# Altium PCB Для Сережи.PcbDoc
Units mil, origin at the board's own origin, x right, y up, seen from the top; angles counter-clockwise.
Board outline 6000 x 4000 mil, 2 copper layers (Top Layer, Bottom Layer); 108 components, 130 nets, 780 pads, 0 vias.
Unrouted connection lines stored in the file: 481.
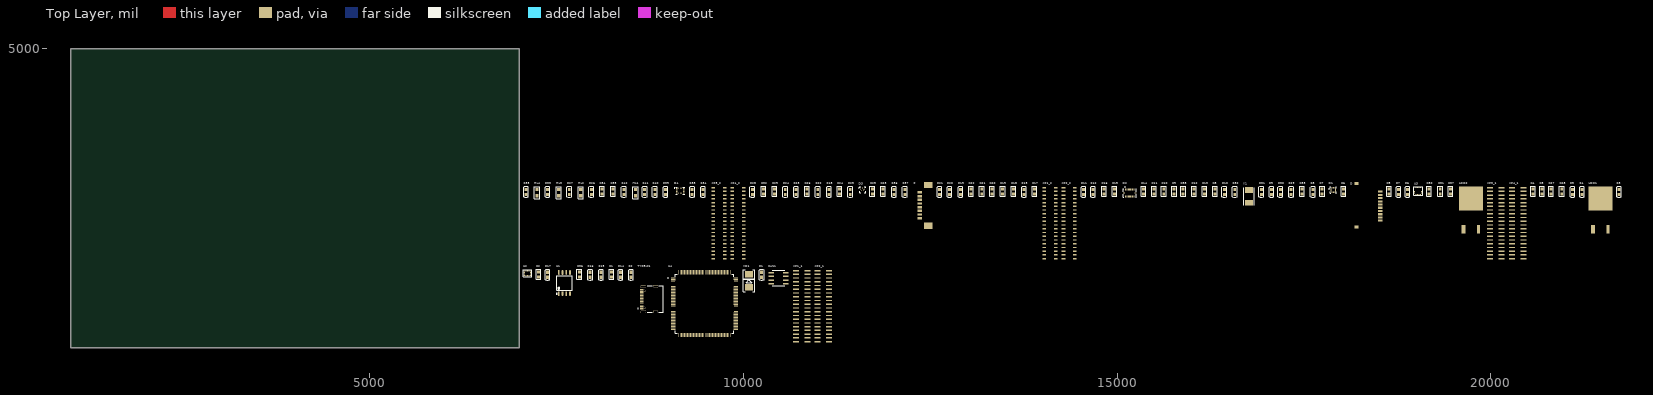
[diagram p0: Top Layer view]
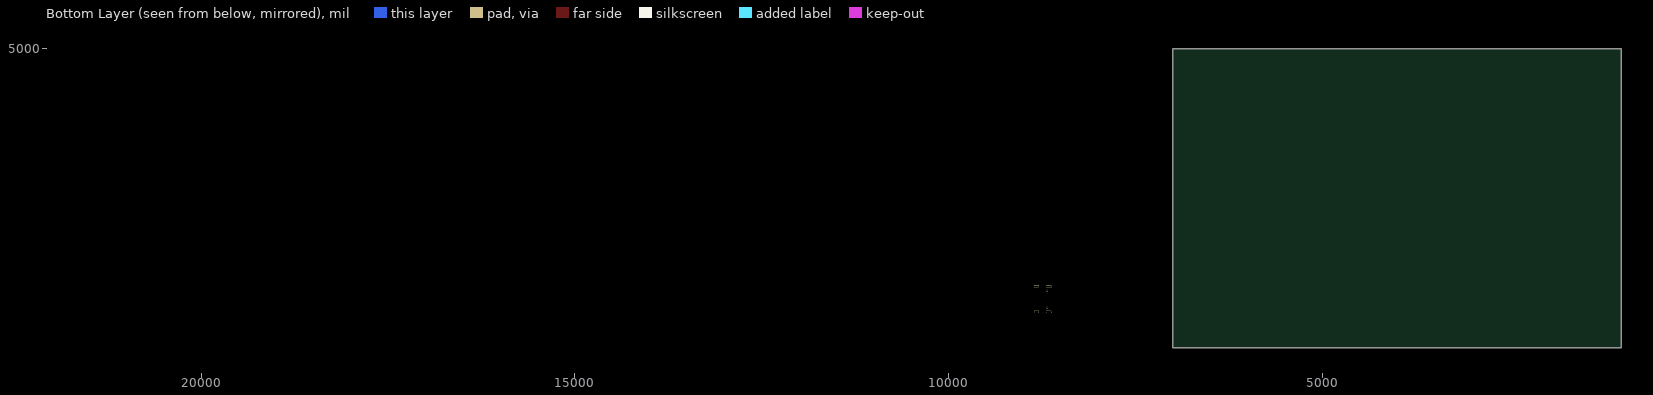
[diagram p1: Bottom Layer view, seen from below]

## Layer stack, top to bottom
Top Solder: solder mask 0.4, Solder Resist, Dk 3.5
Top Layer: signal copper 1.4
Dielectric 1: dielectric 12.6, FR-4, Dk 4.8
Bottom Layer: signal copper 1.4
Bottom Solder: solder mask 0.4, Solder Resist, Dk 3.5

## Board outline
1000,1000 7000,1000 7000,5000 1000,5000

## Design rules (kind name [scope] priority, off if disabled: settings)
Clearance [All] p1: gap=10 ignorepadtopadclearanceinfootprint=FALSE except(0: Arc-Hole Track-Hole SMDPad-Hole THPad-Hole Via-Hole Fill-Hole Poly-Hole Region-Hole Text-Hole)
PolygonConnect [All] p1: connectstyle=Relief reliefconductorwidth=10 reliefentries=4 polygonreliefangle="90 Angle" airgapwidth=10
RoutingVias [All] p1: holewidth=28 width=50 viastyle="Through Hole" minholewidth=28 minwidth=50 maxholewidth=28 maxwidth=50
SolderMaskExpansion [All] p1: expansion=4 istentingtop=FALSE
Width [All] p1: maxlimit=10 minlimit=10 preferedwidth=10
30 further rules are at their usual default settings.

## Components (designator, comment, footprint, x,y, rotation, side; value= is the part's Value field where it differs from the comment)
C1 "47 nF" C0603 8235,1980 r90 top
C2 "100 nF" C0603 7260,1980 r90 top
C3 "100 nF" C0603 20685,3090 r90 top
C4 "100 nF" C0603 20565,3090 r90 top
C5 "4.7 uF" C0603 18640,3090 r90 top
C6 "0.22 uF" C0603 18030,3090 r90 top
C7 "22 pF" C0603 17745,3090 r90 top
C8 "22 pF" C0603 16310,3090 r90 top
C9 "100 nF" C0603 15765,3090 r90 top
C10 "100 nF" C0603 15625,3090 r90 top
C11 "100 nF" C0603 15495,3090 r90 top
C12 "100 nF" C0603 16030,3090 r90 top
C13 "100 nF" C0603 16170,3090 r90 top
C14 "100 nF" C0603 15355,3090 r90 top
C15 "100 nF" C0603 14965,3090 r90 top
C16 "100 nF" C0603 14825,3090 r90 top
C17 "100 nF" C0603 13895,3090 r90 top
C18 "100 nF" C0603 13615,3090 r90 top
C19 "100 nF" C0603 13470,3090 r90 top
C20 "100 nF" C0603 13325,3090 r90 top
C21 "100 nF" C0603 13190,3090 r90 top
C22 "100 nF" C0603 13045,3090 r90 top
C23 "100 nF" C0603 11870,3090 r90 top
C24 "100 nF" C0603 11285,3090 r90 top
C25 "100 nF" C0603 11725,3090 r90 top
C26 "100 nF" C0603 10850,3090 r90 top
C27 "0.1 uF" C0603 20805,3090 r90 top
C28 "10 uF" C0603 20950,3090 r90 top
C29 "100 nF" C0603 10415,3090 r90 top
C30 "0.1 uF" C0603 19175,3090 r90 top
C31 "10 uF" C0603 19325,3090 r90 top
C32 "100 nF" C0603 10270,3090 r90 top
C33 "0.1 uF" C0603 17475,3090 r90 top
C34 "100 nF" C0603 8110,3090 r90 top
C35 "100 nF" C0603 8255,3090 r90 top
C36 "100 nF" C0603 7805,1980 r90 top
C37 "100 nF" C0603 19460,3090 r90 top
C38 "100 nF" C0603 15885,3090 r90 top
CAN1 "TJA1040T" SO-8_S 10470,1930 r0 top
D "D" GTFP08131Y2HR 18235,2890 r90 top
D1 "BMP388" PQFN50P200X200X80-10N 17895,3110 r0 top
D2 "BMI088" PQFN50P450X300X100-16N 15170,3070 r0 top
D3 "BMM150" XDCR_BMM150 11595,3115 r0 top
D4 "BMI270" XDCR_BMI270 9155,3100 r0 top
HL1 "" LD0805 8555,3075 r90 top
HL2 "" LD0805 7825,3075 r90 top
HL3 "" LD0805 7530,3075 r90 top
HL4 "" LD0805 7240,3075 r90 top
LDO1 "КФ1158Н" ТО-263 21365,2625 r0 top
LDO2 "КФ1158Н" ТО-263 19630,2625 r0 top
P "Header 1x8" "PicoBlade 8pin" 12360,2905 r90 top
R1 "60Om" R0603 10245,1975 r90 top
R2 "60 Om" R0603 8495,1975 r90 top
R3 "0" R0603 21715,3085 r90 top
R4 "0" R0603 21220,3085 r90 top
R5 "0" R0603 21095,3085 r90 top
R6 "2.2k" R0603 18885,3085 r90 top
R7 "2.2k" R0603 18765,3085 r90 top
R8 "0" R0603 17620,3085 r90 top
R9 "0" R0603 17065,3085 r90 top
R10 "0" R0603 16435,3085 r90 top
R11 "0" R0603 14550,3085 r90 top
R12 "0" R0603 14680,3085 r90 top
R13 "0" R0603 13755,3085 r90 top
R14 "5,1 кОм" R0603 8355,1975 r90 top
R15 "68" R0603 8095,1975 r90 top
R16 "68" R0603 7950,1975 r90 top
R17 "5,1 кОм" R0603 7380,1975 r90 top
R18 "47 Ом" R0603 11145,3085 r90 top
R19 "47 кОм" R0603 12905,3085 r90 top
R20 "47 кОм" R0603 12760,3085 r90 top
R21 "47 кОм" R0603 12625,3085 r90 top
R22 "0" R0603 10995,3085 r90 top
R23 "0" R0603 10705,3085 r90 top
R24 "0" R0603 10560,3085 r90 top
R25 "47 кОм" R0603 11430,3085 r90 top
R26 "220" R0603 7965,3085 r90 top
R27 "220" R0603 7670,3085 r90 top
R28 "0" R0603 10120,3085 r90 top
R29 "47 кОм" R0603 17330,3085 r90 top
R30 "47 кОм" R0603 17185,3085 r90 top
R31 "47 кОм" R0603 16930,3085 r90 top
R32 "47 кОм" R0603 16575,3085 r90 top
R33 "220" R0603 7380,3085 r90 top
R34 "0" R0603 9460,3085 r90 top
R35 "220" R0603 7090,3085 r90 top
R36 "10 kOm" R0603 12015,3085 r90 top
R37 "0" R0603 12160,3085 r90 top
R38 "10 кОм" R0603 9315,3085 r90 top
R39 "0" R0603 8960,3085 r90 top
R40 "0" R0603 8815,3085 r90 top
R41 "0" R0603 8680,3085 r90 top
R42 "0" R0603 8400,3085 r90 top
TYPE-C1 "TYPE-C-31-M-12" HRO_TYPE-C-31-M-12 8825,1650 r90 top
U1 "W25Q128FVSIG" SOIC127P790X216-8N 7605,1865 r90 top
U2 "QMI8658" QMI8658 7115,1995 r0 top
U3 "QMC5883L" QMC5883L 19030,3100 r0 top
U4 "K1921BK01T2" QFP50P2200X2200X160-144N 9480,1590 r0 top
VD1 "" DO-214AA 10075,1895 r90 top
XP1_1 "PLLD-1.27-40S" "Headr 2x20 male" 10780,1565 r0 top
XP1_2 "PLLD-1.27-40S" "Headr 2x20 Female" 14100,2710 r0 top
XP2_1 "PLLD-1.27-40S" "Headr 2x20 male" 11070,1565 r0 top
XP2_2 "PLLD-1.27-40S" "Headr 2x20 Female" 14355,2710 r0 top
XP3_1 "PLLD-1.27-40S" "Headr 2x20 male" 20065,2675 r0 top
XP3_2 "PLLD-1.27-40S" "Headr 2x20 Female" 9670,2710 r0 top
XP4_1 "PLLD-1.27-40S" "Headr 2x20 male" 20360,2675 r0 top
XP4_2 "PLLD-1.27-40S" "Headr 2x20 Female" 9925,2710 r0 top
Y1 "8 мгц" XTAL_ABM7-8.000MHZ-8-R80-D2Y-T 16765,3025 r90 top

## Footprints (in the part's own frame and the unit in brackets; to place one, negate y for a bottom-side part, rotate by r counter-clockwise, add the part's x,y. Pads: shape width x height; smd on the part's side, far side on the other; paste and mask are expansions set on the pad)
C0603 [mm] "1608M"
  rect 1.1x1 smd: 1(-0.85,0) 2(0.85,0)
  silkscreen extent -1.7,-0.8 1.7,0.8, body extent -0.8,-0.4 0.8,0.4, height 0.91
DO-214AA [mm] "(SMB) Low profile package"
  rect 2.2x2.8 smd: 1(-2.25,0) 2(2.25,0)
  silkscreen extent -3.75,-2 3.75,2, body extent -2.7,-1.8 2.7,1.8, height 2.3
GTFP08131Y2HR [mm]
  rect 0.7x1.6 smd: 1(-4.85,-7.325) 2(-3.75,-7.325) 3(-2.65,-7.325) 4(-1.55,-7.325) 5(-0.45,-7.325) 6(0.65,-7.325) 7(1.75,-7.325) 8(2.85,-7.325) 9(3.95,-7.325) CD(5.05,-7.325)
  rect 1x1.5 smd: S1(-7.05,0.8) S2(7.8,0.8)
"Headr 2x20 Female" [mm]
  rect 1.2x0.45 smd: 1(-1.82,10.962) 2(2.08,10.962) 3(-1.82,9.692) 4(2.08,9.692) 5(-1.82,8.422) 6(2.08,8.422) 7(-1.82,7.152) 8(2.08,7.152) 9(-1.82,5.882) 10(2.08,5.882) 11(-1.82,4.612) 12(2.08,4.612) 13(-1.82,3.342) 14(2.08,3.342) 15(-1.82,2.072) 16(2.08,2.072) 17(-1.82,0.802) 18(2.08,0.802) 19(-1.82,-0.468) 20(2.08,-0.468) 21(-1.82,-1.738) 22(2.08,-1.738) 23(-1.82,-3.008) 24(2.08,-3.008) 25(-1.82,-4.278) 26(2.08,-4.278) 27(-1.82,-5.548) 28(2.08,-5.548) 29(-1.82,-6.818) 30(2.08,-6.818) 31(-1.82,-8.088) 32(2.08,-8.088) 33(-1.82,-9.358) 34(2.08,-9.358) 35(-1.82,-10.628) 36(2.08,-10.628) 37(-1.82,-11.898) 38(2.08,-11.898) 39(-1.82,-13.168) 40(2.08,-13.168)
"Headr 2x20 male" [mm]
  rect 2x0.45 smd: 1(-1.947,11.851) 2(1.953,11.851) 3(-1.947,10.581) 4(1.953,10.581) 5(-1.947,9.311) 6(1.953,9.311) 7(-1.947,8.041) 8(1.953,8.041) 9(-1.947,6.771) 10(1.953,6.771) 11(-1.947,5.501) 12(1.953,5.501) 13(-1.947,4.231) 14(1.953,4.231) 15(-1.947,2.961) 16(1.953,2.961) 17(-1.947,1.691) 18(1.953,1.691) 19(-1.947,0.421) 20(1.953,0.421) 21(-1.947,-0.849) 22(1.953,-0.849) 23(-1.947,-2.119) 24(1.953,-2.119) 25(-1.947,-3.389) 26(1.953,-3.389) 27(-1.947,-4.659) 28(1.953,-4.659) 29(-1.947,-5.929) 30(1.953,-5.929) 31(-1.947,-7.199) 32(1.953,-7.199) 33(-1.947,-8.469) 34(1.953,-8.469) 35(-1.947,-9.739) 36(1.953,-9.739) 37(-1.947,-11.009) 38(1.953,-11.009) 39(-1.947,-12.279) 40(1.953,-12.279)
HRO_TYPE-C-31-M-12 [mm]
  rect 0.6x1.14 smd mask+0.05: A1_B12(-3.2,4.75) A4_B9(-2.4,4.75) B1_A12(3.2,4.75) B4_A9(2.4,4.75)
  rect 0.3x1.14 smd mask+0.05: A5(-1.25,4.75) A6(-0.25,4.75) A7(0.25,4.75) A8(1.25,4.75) B5(1.75,4.75) B6(0.75,4.75) B7(-0.75,4.75) B8(-1.75,4.75)
  oval 0.9x2 hole 0.6 slot 1.7 at 90 deg: S1(-4.325,4.17) S2(4.325,4.17)
  oval 0.9x1.7 hole 0.6 slot 1.4 at 90 deg: S3(-4.325,0) S4(4.325,0)
  round 0.6 hole 0.6 unplated: ""(-2.89,3.68) ""(2.89,3.68)
  silkscreen extent -4.47,-2.6 4.47,6.1, body extent -4.47,-2.6 4.47,5.31, height 3.31
LD0805 [mm]
  rect 1.1x1.1 smd: 1(-1.1,0) 2(1.1,0)
  silkscreen extent -2,-0.9 2,0.9, body extent -1,-0.62 1,0.63, height 0.73
"PicoBlade 8pin" [mm]
  rect 0.8x1.6 smd: 1(-4.365,0) 2(-3.115,0) 3(-1.865,0) 4(-0.615,0) 5(0.635,0) 6(1.885,0) 7(3.135,0) 8(4.385,0)
  rect 2.1x3 smd: S(-6.915,-2.9) S(6.935,-2.9)
PQFN50P200X200X80-10N [mm]
  rrect9% 0.35x0.38 smd: 1(-0.765,0.25) 2(-0.765,-0.25) 3(-0.5,-0.765) 4(0,-0.765) 5(0.5,-0.765) 6(0.765,-0.25) 7(0.765,0.25) 8(0.5,0.765) 9(0,0.765) 10(-0.5,0.765)
  silkscreen extent -1.6,-1.03 1.03,1.03
PQFN50P450X300X100-16N [mm]
  rect 0.35x0.59 smd: 1(-1.5,1.165) 2(-1,1.165) 3(-0.5,1.165) 4(0,1.165) 5(0.5,1.165) 6(1,1.165) 7(1.5,1.165) 9(1.5,-1.165) 10(1,-1.165) 11(0.5,-1.165) 12(0,-1.165) 13(-0.5,-1.165) 14(-1,-1.165) 15(-1.5,-1.165)
  rect 0.59x0.35 smd: 8(1.915,0) 16(-1.915,0)
  silkscreen extent -2.25,-1.5 2.25,2.2
QFP50P2200X2200X160-144N [mm]
  rrect25% 1.47x0.28 smd: 1(-10.67,8.75) 2(-10.67,8.25) 3(-10.67,7.75) 4(-10.67,7.25) 5(-10.67,6.75) 6(-10.67,6.25) 7(-10.67,5.75) 8(-10.67,5.25) 9(-10.67,4.75) 10(-10.67,4.25) 11(-10.67,3.75) 12(-10.67,3.25) 13(-10.67,2.75) 14(-10.67,2.25) 15(-10.67,1.75) 16(-10.67,1.25) 17(-10.67,0.75) 18(-10.67,0.25) 19(-10.67,-0.25) 20(-10.67,-0.75) 21(-10.67,-1.25) 22(-10.67,-1.75) 23(-10.67,-2.25) 24(-10.67,-2.75) 25(-10.67,-3.25) 26(-10.67,-3.75) 27(-10.67,-4.25) 28(-10.67,-4.75) 29(-10.67,-5.25) 30(-10.67,-5.75) 31(-10.67,-6.25) 32(-10.67,-6.75) 33(-10.67,-7.25) 34(-10.67,-7.75) 35(-10.67,-8.25) 36(-10.67,-8.75) 73(10.67,-8.75) 74(10.67,-8.25) 75(10.67,-7.75) 76(10.67,-7.25) 77(10.67,-6.75) 78(10.67,-6.25) 79(10.67,-5.75) 80(10.67,-5.25) 81(10.67,-4.75) 82(10.67,-4.25) 83(10.67,-3.75) 84(10.67,-3.25) 85(10.67,-2.75) 86(10.67,-2.25) 87(10.67,-1.75) 88(10.67,-1.25) 89(10.67,-0.75) 90(10.67,-0.25) 91(10.67,0.25) 92(10.67,0.75) 93(10.67,1.25) 94(10.67,1.75) 95(10.67,2.25) 96(10.67,2.75) 97(10.67,3.25) 98(10.67,3.75) 99(10.67,4.25) 100(10.67,4.75) 101(10.67,5.25) 102(10.67,5.75) 103(10.67,6.25) 104(10.67,6.75) 105(10.67,7.25) 106(10.67,7.75) 107(10.67,8.25) 108(10.67,8.75)
  rrect25% 0.28x1.47 smd: 37(-8.75,-10.67) 38(-8.25,-10.67) 39(-7.75,-10.67) 40(-7.25,-10.67) 41(-6.75,-10.67) 42(-6.25,-10.67) 43(-5.75,-10.67) 44(-5.25,-10.67) 45(-4.75,-10.67) 46(-4.25,-10.67) 47(-3.75,-10.67) 48(-3.25,-10.67) 49(-2.75,-10.67) 50(-2.25,-10.67) 51(-1.75,-10.67) 52(-1.25,-10.67) 53(-0.75,-10.67) 54(-0.25,-10.67) 55(0.25,-10.67) 56(0.75,-10.67) 57(1.25,-10.67) 58(1.75,-10.67) 59(2.25,-10.67) 60(2.75,-10.67) 61(3.25,-10.67) 62(3.75,-10.67) 63(4.25,-10.67) 64(4.75,-10.67) 65(5.25,-10.67) 66(5.75,-10.67) 67(6.25,-10.67) 68(6.75,-10.67) 69(7.25,-10.67) 70(7.75,-10.67) 71(8.25,-10.67) 72(8.75,-10.67) 109(8.75,10.67) 110(8.25,10.67) 111(7.75,10.67) 112(7.25,10.67) 113(6.75,10.67) 114(6.25,10.67) 115(5.75,10.67) 116(5.25,10.67) 117(4.75,10.67) 118(4.25,10.67) 119(3.75,10.67) 120(3.25,10.67) 121(2.75,10.67) 122(2.25,10.67) 123(1.75,10.67) 124(1.25,10.67) 125(0.75,10.67) 126(0.25,10.67) 127(-0.25,10.67) 128(-0.75,10.67) 129(-1.25,10.67) 130(-1.75,10.67) 131(-2.25,10.67) 132(-2.75,10.67) 133(-3.25,10.67) 134(-3.75,10.67) 135(-4.25,10.67) 136(-4.75,10.67) 137(-5.25,10.67) 138(-5.75,10.67) 139(-6.25,10.67) 140(-6.75,10.67) 141(-7.25,10.67) 142(-7.75,10.67) 143(-8.25,10.67) 144(-8.75,10.67)
  silkscreen extent -12.44,-10 10,10
QMC5883L [mm]
  rect 0.4x0.3 smd: 1(1.225,0.675) 2(1.225,0.175) 3(1.225,-0.325) 4(1.225,-0.825) 9(-1.225,-0.825) 10(-1.225,-0.325) 11(-1.225,0.175) 12(-1.225,0.675)
  rect 0.3x0.4 smd: 5(0.75,-1.3) 6(0.25,-1.3) 7(-0.25,-1.3) 8(-0.75,-1.3) 13(-0.75,1.15) 14(-0.25,1.15) 15(0.25,1.15) 16(0.75,1.15)
  silkscreen extent -1.5,-1.58 1.5,1.42
QMI8658 [mm]
  rect 0.5x0.3 smd: 1(1.075,0.8) 2(1.075,0.3) 3(1.075,-0.2) 4(1.075,-0.7) 8(-1.225,-0.7) 9(-1.225,-0.2) 10(-1.225,0.3) 11(-1.225,0.8)
  rect 0.3x0.5 smd: 5(0.425,-0.85) 6(-0.075,-0.85) 7(-0.575,-0.85) 12(-0.575,0.95) 13(-0.075,0.95) 14(0.425,0.95)
  silkscreen extent -1.57,-1.2 1.43,1.3
R0603 [mm] "1608M"
  rect 1.1x1 smd: 1(-0.85,0) 2(0.85,0)
  silkscreen extent -1.8,-0.8 1.8,0.8, body extent -0.8,-0.4 0.8,0.4, height 0.38
SO-8_S [mil]
  rect 78x21 smd: 1(-97,75) 2(-97,25) 3(-97,-25) 4(-97,-75) 5(97,-75) 6(97,-25) 7(97,25) 8(97,75)
  silkscreen extent -84,-104 84,104, body extent -96,-118 96,118, height 69
SOIC127P790X216-8N [mm]
  oval 1.6x0.6 smd: 1(-3.6,1.905) 2(-3.6,0.635) 3(-3.6,-0.635) 4(-3.6,-1.905) 5(3.6,-1.905) 6(3.6,-0.635) 7(3.6,0.635) 8(3.6,1.905)
  silkscreen extent -3.82,-2.65 2.47,2.82
XDCR_BMI270 [mm]
  rect 0.475x0.25 smd: 1(-1.162,0.75) 2(-1.162,0.25) 3(-1.162,-0.25) 4(-1.162,-0.75) 8(1.162,-0.75) 9(1.162,-0.25) 10(1.162,0.25) 11(1.162,0.75)
  rect 0.25x0.475 smd: 5(-0.5,-0.913) 6(0,-0.913) 7(0.5,-0.913) 12(0.5,0.913) 13(0,0.913) 14(-0.5,0.913)
  silkscreen extent -2.07,-1.25 1.5,1.25, body extent -1.5,-1.25 1.5,1.25, height 0.87
XDCR_BMM150 [mm]
  round 0.2 smd: A1(-0.601,0.601) A3(-0.035,0.601) A5(0.531,0.601) B2(-0.318,0.318) B4(0.248,0.318) C1(-0.601,0.035) C5(0.531,0.035) D2(-0.318,-0.248) D4(0.248,-0.248) E1(-0.601,-0.531) E3(-0.035,-0.531) E5(0.531,-0.531)
  silkscreen extent -1.37,-1.02 1.02,1.02
XTAL_ABM7-8.000MHZ-8-R80-D2Y-T [mm]
  rect 1.9x2.6 smd: 1(-2.15,0) 2(2.15,0)
  silkscreen extent -3,-1.75 3,1.75
ТО-263 [mm]
  rect 1.4x2.79 smd: 1(0.127,-1.022)
  rect 8.13x8.13 smd: 2(2.667,9.398)
  rect 0.99x2.79 smd: 3(5.207,-1.022)

## Part data
C1 C2 C3 C4 C5 C6 C7 C8 C9 C10 C11 C12 C13 C14 C15 C16 C17 C18 C19 C20 C21 C22 C23 C24 C25 C26 C27 C28 C29 C30 C31 C32 C33 C34 C35 C36 C37 C38: library part Capacitor, Published=18.05.2010, Publisher="Andrew Danich", Type=Конденсатор
D: library part GTFP08131Y2HR
HL1 HL2 HL3 HL4: library part Led-1, Published=03.12.2013, Publisher="Andrew Danich", Type="Индикатор единичный"
R1 R2 R3 R4 R5 R6 R7 R8 R9 R10 R11 R12 R13 R14 R15 R16 R17 R18 R19 R20 R21 R22 R23 R24 R25 R26 R27 R28 R29 R30 R31 R32 R33 R34 R35 R36 R37 R38 R39 R40 R41 R42: library part Resistor, Published=24.03.2010, Publisher="Andrew Danich", Type=Резистор
VD1: library part Schottky
Y1: library part ABM7-8.000MHZ-8-R80-D2Y-T, "Crystal 22.1184MHz Ã‚Â±20ppm (Tol) Ã‚Â±30ppm (Stability) 18pF FUND 50Ohm 2-Pin Mini-CSMD T/R", Package=None, Availability=Unavailable, MP=ABM7-8.000MHZ-8-R80-D2Y-T, Price=None

## Nets (pads, with @x,y where several pads share a name; then routed paths per layer and width w, separated by ;. In a path a pad name is that pad's centre, name@x,y a point inside that pad or via, vN(x,y) a via of type N, cw(c..) or ccw(c..) an arc to the next point about the centre after c; other vN are vias at no path point)
3V3: C2.2 C9.2 C10.2 C11.2 C14.2 C15.2 C16.2 C17.2 C18.2 C19.2 C20.2 C21.2 C22.2 C24.2 C28.2 C33.2 C38.2 D.4 LDO1.3 P.1 R18.1 R19.2 R20.2 R21.2 R26.2 R27.2 R28.2 R29.1 R30.1 R31.1 R32.1 R33.2 U1.8 U4.6 U4.17 U4.30 U4.33 U4.39 U4.52 U4.62 U4.72 U4.84 U4.95 U4.108 U4.121 U4.131 U4.144 XP1_1.9 XP1_1.10 XP1_2.9 XP1_2.10 XP4_1.31 XP4_1.32 XP4_2.31 XP4_2.32
3V3_SEN: C3.2 C4.2 C12.2 C13.2 C23.2 C25.2 C29.2 C31.2 C32.2 C37.2 D1.1 D1.10 D2.3 D2.11 D3.B2 D3.E5 LDO2.3 R6.2 R7.2 R35.2 R38.2 R42.2 U2.5 U2.8 U3.2 U3.4 U3.13
4V2: XP1_1.11 XP1_1.12 XP1_1.13 XP1_1.14 XP1_2.11 XP1_2.12 XP1_2.13 XP1_2.14 XP4_1.27 XP4_1.28 XP4_1.29 XP4_1.30 XP4_2.27 XP4_2.28 XP4_2.29 XP4_2.30
5V: C27.2 C30.2 C36.1 CAN1.3 LDO1.1 LDO2.1 XP1_1.7 XP1_1.8 XP1_2.7 XP1_2.8 XP4_1.33 XP4_1.34 XP4_2.33 XP4_2.34
GND: C1.1 C2.1 C3.1 C4.1 C5.1 C7.1 C8.1 C9.1 C10.1 C11.1 C12.1 C13.1 C14.1 C15.1 C16.1 C17.1 C18.1 C19.1 C20.1 C21.1 C22.1 C23.1 C24.1 C25.1 C26.1 C27.1 C28.1 C29.1 C30.1 C31.1 C32.1 C33.1 C34.1 C35.1 C36.2 C37.1 C38.1 CAN1.2 CAN1.8 D1.3 D1.8 D1.9 D2.2 D2.4 D2.6 D2.7 D3.A1 D3.C5 D3.E1 D3.E3 D4.6 D4.7 D.6 D.S1 D.S2 HL3.2 HL4.2 LDO1.2 LDO2.2 P.6 R14.1 R17.2 R25.2 R34.1 R36.2 R37.2 U1.4 U2.6 U2.7 U3.9 U3.11 U4.16 U4.38 U4.51 U4.61 U4.83 U4.94 U4.107 U4.120 U4.130 XP1_1.37 XP1_1.38 XP1_1.39 XP1_1.40 XP1_2.37 XP1_2.38 XP1_2.39 XP1_2.40 XP2_1.1 XP2_1.2 XP2_1.3 XP2_1.4 XP2_1.5 XP2_1.6 XP2_1.37 XP2_1.38 XP2_1.39 XP2_1.40 XP2_2.1 XP2_2.2 XP2_2.3 XP2_2.4 XP2_2.5 XP2_2.6 XP2_2.37 XP2_2.38 XP2_2.39 XP2_2.40 XP3_1.1 XP3_1.2 XP3_1.3 XP3_1.4 XP3_1.35 XP3_1.36 XP3_1.37 XP3_1.38 XP3_1.39 XP3_1.40 XP3_2.1 XP3_2.2 XP3_2.3 XP3_2.4 XP3_2.35 XP3_2.36 XP3_2.37 XP3_2.38 XP3_2.39 XP3_2.40 XP4_1.1 XP4_1.2 XP4_1.3 XP4_1.4 XP4_2.1 XP4_2.2 XP4_2.3 XP4_2.4
NetC1_2: C1.2 CAN1.5 R1.2 R2.2
NetC5_2: C5.2 U3.10
NetC6_1: C6.1 U3.12
NetC6_2: C6.2 U3.8
NetC7_2: C7.2 U4.24 Y1.2
NetC8_2: C8.2 U4.23 Y1.1
NetC26_2: C26.2 R18.2 U4.32
NetC34_2: C34.2 D4.5 R42.1
NetC35_2: C35.2 D4.8
NetCAN1_1: CAN1.1 U4.74
NetCAN1_4: CAN1.4 U4.73
NetCAN1_6: CAN1.6 R2.1 XP2_1.26 XP2_2.26
NetCAN1_7: CAN1.7 R1.1 XP2_1.24 XP2_2.24
NetD1_2: D1.2 R8.2
NetD1_4: D1.4 R9.2
NetD1_5: D1.5 R10.2
NetD1_6: D1.6 U4.49
NetD1_7: D1.7 U4.125
NetD2_1: D2.1 U4.92
NetD2_5: D2.5 U4.50
NetD2_8: D2.8 R11.2
NetD2_9: D2.9 R13.2
NetD2_10: D2.10 D2.15 R12.1
NetD2_12: D2.12 U4.91
NetD2_13: D2.13 U4.90
NetD2_14: D2.14 U4.53
NetD2_16: D2.16 U4.93
NetD3_A3: D3.A3 R22.2
NetD3_A5: D3.A5 U4.55
NetD3_B4: D3.B4 R23.2
NetD3_C1: D3.C1 R24.1
NetD3_D2: D3.D2 U4.89
NetD4_1: D4.1 R41.2
NetD4_4: D4.4 U4.88
NetD4_9: D4.9 U4.132
NetD4_12: D4.12 R38.1 U4.22
NetD4_13: D4.13 R39.2
NetD4_14: D4.14 R40.2
NetD_1: D.1 R31.2 U4.101
NetD_2: D.2 R32.2
NetD_3: D.3 U4.42
NetD_5: D.5 U4.48
NetD_7: D.7 R29.2 U4.98
NetD_8: D.8 R30.2 U4.100
NetHL1_1: HL1.1 R26.1
NetHL1_2: HL1.2 U4.8
NetHL2_1: HL2.1 R27.1
NetHL2_2: HL2.2 U4.9
NetHL3_1: HL3.1 R33.1
NetHL4_1: HL4.1 R35.1
NetP_2: P.2 R19.1
NetP_3: P.3 R20.1 U4.110 XP1_1.31 XP1_2.31
NetP_4: P.4 R21.1 U4.105
NetP_5: P.5 R25.1 U4.109
NetP_7: P.7 R5.2 R8.1 R11.1 R22.1 R39.1 U4.133 XP1_1.29 XP1_2.29
NetP_8: P.8 U4.25
NetR3_1: R3.1 U2.1
NetR3_2: R3.2 R10.1 R12.2 R24.2 R41.1 U4.134 XP1_1.25 XP1_2.25
NetR4_1: R4.1 U2.14
NetR4_2: R4.2 R9.1 R13.1 R23.1 R40.1 U4.135 XP1_1.27 XP1_2.27
NetR5_1: R5.1 U2.13
NetR6_1: R6.1 U3.16 U4.10 XP3_1.9 XP3_2.9
NetR7_1: R7.1 U3.1 U4.11 XP3_1.11 XP3_2.11
NetR14_2: R14.2
NetR15_1: R15.1
NetR15_2: R15.2 U4.104
NetR16_1: R16.1
NetR16_2: R16.2 U4.103
NetR17_1: R17.1
NetR28_1: R28.1 R34.2 U4.34
NetR36_1: R36.1 U4.138 XP2_1.20 XP2_2.20
NetR37_1: R37.1 U4.31 XP3_1.32 XP3_2.32
NetTYPE-C1_2: 
NetU1_1: U1.1 U4.123
NetU1_2: U1.2 U4.86
NetU1_3: U1.3 U4.114
NetU1_5: U1.5 U4.85
NetU1_6: U1.6 U4.117
NetU1_7: U1.7 U4.115
NetU2_4: U2.4 U4.127
NetU2_9: U2.9 U4.126
NetU2_12: U2.12 U4.54
NetU4_1: U4.1 XP3_1.10 XP3_2.10
NetU4_2: U4.2 XP3_1.12 XP3_2.12
NetU4_3: U4.3 XP3_1.14 XP3_2.14
NetU4_4: U4.4 XP4_1.5 XP4_2.5
NetU4_5: U4.5 XP4_1.7 XP4_2.7
NetU4_14: U4.14 XP4_1.15 XP4_2.15
NetU4_15: U4.15 XP4_1.17 XP4_2.17
NetU4_26: U4.26 XP3_1.24 XP3_2.24
NetU4_27: U4.27 XP3_1.26 XP3_2.26
NetU4_28: U4.28 XP3_1.28 XP3_2.28
NetU4_29: U4.29 XP3_1.30 XP3_2.30
NetU4_35: U4.35 XP2_1.25 XP2_2.25
NetU4_36: U4.36 XP1_1.19 XP1_2.19
NetU4_37: U4.37 XP1_1.17 XP1_2.17
NetU4_40: U4.40 XP1_1.33 XP1_2.33
NetU4_41: U4.41 XP2_1.17 XP2_2.17
NetU4_43: U4.43 XP2_1.27 XP2_2.27
NetU4_45: U4.45 XP4_1.14 XP4_2.14
NetU4_46: U4.46 XP2_1.19 XP2_2.19
NetU4_47: U4.47 XP2_1.21 XP2_2.21
NetU4_58: U4.58 XP4_1.9 XP4_2.9
NetU4_60: U4.60 XP2_1.7 XP2_2.7
NetU4_64: U4.64 XP2_1.9 XP2_2.9
NetU4_66: U4.66 XP2_1.11 XP2_2.11
NetU4_67: U4.67 XP2_1.13 XP2_2.13
NetU4_69: U4.69 XP4_1.12 XP4_2.12
NetU4_70: U4.70 XP4_1.10 XP4_2.10
NetU4_75: U4.75 XP4_1.16 XP4_2.16
NetU4_81: U4.81 XP2_1.29 XP2_2.29
NetU4_82: U4.82 XP2_1.31 XP2_2.31
NetU4_99: U4.99 XP2_1.23 XP2_2.23
NetU4_111: U4.111 XP3_1.23 XP3_2.23
NetU4_112: U4.112 XP3_1.25 XP3_2.25
NetU4_113: U4.113 XP2_1.30 XP2_2.30
NetU4_116: U4.116 XP2_1.28 XP2_2.28
NetU4_124: U4.124 XP1_1.36 XP1_2.36 XP4_1.24 XP4_2.24
NetU4_129: U4.129 XP1_1.34 XP1_2.34 XP4_1.22 XP4_2.22
NetU4_136: U4.136 XP3_1.29 XP3_2.29
NetU4_137: U4.137 XP3_1.27 XP3_2.27
NetU4_139: U4.139 XP2_1.15 XP2_2.15
NetU4_141: U4.141 XP3_1.6 XP3_2.6
NetU4_142: U4.142 XP3_1.8 XP3_2.8
VCC: XP1_1.1 XP1_1.2 XP1_1.3 XP1_1.4 XP1_1.5 XP1_1.6 XP1_2.1 XP1_2.2 XP1_2.3 XP1_2.4 XP1_2.5 XP1_2.6 XP4_1.35 XP4_1.36 XP4_1.37 XP4_1.38 XP4_1.39 XP4_1.40 XP4_2.35 XP4_2.36 XP4_2.37 XP4_2.38 XP4_2.39 XP4_2.40
pads on no net: D3.D4 D4.2 D4.3 D4.10 D4.11 D.9 D.CD P.S TYPE-C1. TYPE-C1.A1_B12 TYPE-C1.A4_B9 TYPE-C1.A5 TYPE-C1.A6 TYPE-C1.A7 TYPE-C1.A8 TYPE-C1.B1_A12 TYPE-C1.B4_A9 TYPE-C1.B5 TYPE-C1.B6 TYPE-C1.B7 TYPE-C1.B8 TYPE-C1.S1 TYPE-C1.S2 TYPE-C1.S3 TYPE-C1.S4 U2.2 U2.3 U2.10 U2.11 U3.3 U3.5 U3.6 U3.7 U3.14 U3.15 U4.7 U4.12 U4.13 U4.18 U4.19 U4.20 U4.21 U4.44 U4.56 U4.57 U4.59 U4.63 U4.65 U4.68 U4.71 U4.76 U4.77 U4.78 U4.79 U4.80 U4.87 U4.96 U4.97 U4.102 U4.106 U4.118 U4.119 U4.122 U4.128 U4.140 U4.143 VD1.1 VD1.2 XP1_1.15 XP1_1.16 XP1_1.18 XP1_1.20 XP1_1.21 XP1_1.22 XP1_1.23 XP1_1.24 XP1_1.26 XP1_1.28 XP1_1.30 XP1_1.32 XP1_1.35 XP1_2.15 XP1_2.16 XP1_2.18 XP1_2.20 XP1_2.21 XP1_2.22 XP1_2.23 XP1_2.24 XP1_2.26 XP1_2.28 XP1_2.30 XP1_2.32 XP1_2.35 XP2_1.8 XP2_1.10 XP2_1.12 XP2_1.14 XP2_1.16 XP2_1.18 XP2_1.22 XP2_1.32 XP2_1.33 XP2_1.34 XP2_1.35 XP2_1.36 XP2_2.8 XP2_2.10 XP2_2.12 XP2_2.14 XP2_2.16 XP2_2.18 XP2_2.22 XP2_2.32 XP2_2.33 XP2_2.34 XP2_2.35 XP2_2.36 XP3_1.5 XP3_1.7 XP3_1.13 XP3_1.15 XP3_1.16 XP3_1.17 XP3_1.18 XP3_1.19 XP3_1.20 XP3_1.21 XP3_1.22 XP3_1.31 XP3_1.33 XP3_1.34 XP3_2.5 XP3_2.7 XP3_2.13 XP3_2.15 XP3_2.16 XP3_2.17 XP3_2.18 XP3_2.19 XP3_2.20 XP3_2.21 XP3_2.22 XP3_2.31 XP3_2.33 XP3_2.34 XP4_1.6 XP4_1.8 XP4_1.11 XP4_1.13 XP4_1.18 XP4_1.19 XP4_1.20 XP4_1.21 XP4_1.23 XP4_1.25 XP4_1.26 XP4_2.6 XP4_2.8 XP4_2.11 XP4_2.13 XP4_2.18 XP4_2.19 XP4_2.20 XP4_2.21 XP4_2.23 XP4_2.25 XP4_2.26

## Text inside footprints (layer, text, board x,y; h text height)
TYPE-C1: Mechanical 13 "PCB EDGE" at 8899.8,1854.72 h24 r90